# EAGLE board 1 (EAGLE 5.10)

Size 160 x 100 mm. Coordinates in mm from the lower left corner, seen from the top.
Outline: 0,0 160,0 160,100 0,100 0,0
Copper layers (1*16): Top 0.035mm / dielectric 1.5mm / Bottom 0.035mm
Design rules "default": minimum track width 10mil, minimum drill 24mil, track to track 8mil, track to pad 8mil, pad to pad 8mil, via to via 8mil, smd to smd 8mil, copper to edge 40mil, drill to drill 8mil, minimum pad ring 10mil, minimum via ring 8mil, stop-mask expansion 4mil, vias tented up to drill 0mil, thermal gap 10mil

## Footprints (pad centres in the part's own frame; a part is rotated, then mirrored left to right if it is on the bottom)
C025-050X050 = drill 0.813 octagon: 1 -1.27,0; 2 1.27,0
C1206K = smd 1.5 x 2: 1 -1.5,0; 2 1.5,0
10X02MTA = drill 1.016 long: 1 1.27,0; 2 -1.27,0
1X06 = drill 1.016 long: 1 -6.35,0; 2 -3.81,0; 3 -1.27,0; 4 1.27,0; 5 3.81,0; 6 6.35,0
1X05 = drill 1.016 long: 1 -5.08,0; 2 -2.54,0; 3 0,0; 4 2.54,0; 5 5.08,0
1X30 = drill 1.016 long: 1 -36.83,0; 2 -34.29,0; 3 -31.75,0; 4 -29.21,0; 5 -26.67,0; 6 -24.13,0; 7 -21.59,0; 8 -19.05,0; 9 -16.51,0; 10 -13.97,0; 11 -11.43,0; 12 -8.89,0; 13 -6.35,0; 14 -3.81,0; 15 -1.27,0; 16 1.27,0; 17 3.81,0; 18 6.35,0; 19 8.89,0; 20 11.43,0; 21 13.97,0; 22 16.51,0; 23 19.05,0; 24 21.59,0; 25 24.13,0; 26 26.67,0; 27 29.21,0; 28 31.75,0; 29 34.29,0; 30 36.83,0
1X02 = drill 1.016 long: 1 -1.27,0; 2 1.27,0
1X04 = drill 1.016 long: 1 -3.81,0; 2 -1.27,0; 3 1.27,0; 4 3.81,0
1X03 = drill 1.016 long: 1 -2.54,0; 2 0,0; 3 2.54,0
1X14 = drill 1.016 long: 1 -16.51,0; 2 -13.97,0; 3 -11.43,0; 4 -8.89,0; 5 -6.35,0; 6 -3.81,0; 7 -1.27,0; 8 1.27,0; 9 3.81,0; 10 6.35,0; 11 8.89,0; 12 11.43,0; 13 13.97,0; 14 16.51,0
1X12 = drill 1.016 long: 1 -13.97,0; 2 -11.43,0; 3 -8.89,0; 4 -6.35,0; 5 -3.81,0; 6 -1.27,0; 7 1.27,0; 8 3.81,0; 9 6.35,0; 10 8.89,0; 11 11.43,0; 12 13.97,0
1X01 = drill 1.016 octagon: 1 0,0
0207/10 = drill 0.813 octagon: 1 -5.08,0; 2 5.08,0
L4532M = smd 2 x 2.4: 1 -1.9,0; 2 1.9,0
HC49/S = drill 0.813 round: 1 -2.413,0; 2 2.413,0
LQFP144 = smd 0.25 x 1: 1 -8.75,-10.5; 2 -8.25,-10.5; 3 -7.75,-10.5; 4 -7.25,-10.5; 5 -6.75,-10.5; 6 -6.25,-10.5; 7 -5.75,-10.5; 8 -5.25,-10.5; 9 -4.75,-10.5; 10 -4.25,-10.5; 11 -3.75,-10.5; 12 -3.25,-10.5; 13 -2.75,-10.5; 14 -2.25,-10.5; 15 -1.75,-10.5; 16 -1.25,-10.5; 17 -0.75,-10.5; 18 -0.25,-10.5; 19 0.25,-10.5; 20 0.75,-10.5; 21 1.25,-10.5; 22 1.75,-10.5; 23 2.25,-10.5; 24 2.75,-10.5; 25 3.25,-10.5; 26 3.75,-10.5; 27 4.25,-10.5; 28 4.75,-10.5; 29 5.25,-10.5; 30 5.75,-10.5; 31 6.25,-10.5; 32 6.75,-10.5; 33 7.25,-10.5; 34 7.75,-10.5; 35 8.25,-10.5; 36 8.75,-10.5; 73 8.75,10.5; 74 8.25,10.5; 75 7.75,10.5; 76 7.25,10.5; 77 6.75,10.5; 78 6.25,10.5; 79 5.75,10.5; 80 5.25,10.5; 81 4.75,10.5; 82 4.25,10.5; 83 3.75,10.5; 84 3.25,10.5; 85 2.75,10.5; 86 2.25,10.5; 87 1.75,10.5; 88 1.25,10.5; 89 0.75,10.5; 90 0.25,10.5; 91 -0.25,10.5; 92 -0.75,10.5; 93 -1.25,10.5; 94 -1.75,10.5; 95 -2.25,10.5; 96 -2.75,10.5; 97 -3.25,10.5; 98 -3.75,10.5; 99 -4.25,10.5; 100 -4.75,10.5; 101 -5.25,10.5; 102 -5.75,10.5; 103 -6.25,10.5; 104 -6.75,10.5; 105 -7.25,10.5; 106 -7.75,10.5; 107 -8.25,10.5; 108 -8.75,10.5 | smd 1 x 0.25: 37 10.5,-8.75; 38 10.5,-8.25; 39 10.5,-7.75; 40 10.5,-7.25; 41 10.5,-6.75; 42 10.5,-6.25; 43 10.5,-5.75; 44 10.5,-5.25; 45 10.5,-4.75; 46 10.5,-4.25; 47 10.5,-3.75; 48 10.5,-3.25; 49 10.5,-2.75; 50 10.5,-2.25; 51 10.5,-1.75; 52 10.5,-1.25; 53 10.5,-0.75; 54 10.5,-0.25; 55 10.5,0.25; 56 10.5,0.75; 57 10.5,1.25; 58 10.5,1.75; 59 10.5,2.25; 60 10.5,2.75; 61 10.5,3.25; 62 10.5,3.75; 63 10.5,4.25; 64 10.5,4.75; 65 10.5,5.25; 66 10.5,5.75; 67 10.5,6.25; 68 10.5,6.75; 69 10.5,7.25; 70 10.5,7.75; 71 10.5,8.25; 72 10.5,8.75; 109 -10.5,8.75; 110 -10.5,8.25; 111 -10.5,7.75; 112 -10.5,7.25; 113 -10.5,6.75; 114 -10.5,6.25; 115 -10.5,5.75; 116 -10.5,5.25; 117 -10.5,4.75; 118 -10.5,4.25; 119 -10.5,3.75; 120 -10.5,3.25; 121 -10.5,2.75; 122 -10.5,2.25; 123 -10.5,1.75; 124 -10.5,1.25; 125 -10.5,0.75; 126 -10.5,0.25; 127 -10.5,-0.25; 128 -10.5,-0.75; 129 -10.5,-1.25; 130 -10.5,-1.75; 131 -10.5,-2.25; 132 -10.5,-2.75; 133 -10.5,-3.25; 134 -10.5,-3.75; 135 -10.5,-4.25; 136 -10.5,-4.75; 137 -10.5,-5.25; 138 -10.5,-5.75; 139 -10.5,-6.25; 140 -10.5,-6.75; 141 -10.5,-7.25; 142 -10.5,-7.75; 143 -10.5,-8.25; 144 -10.5,-8.75

## Placement (x,y rotation side)
C1  [C025-050X050]  92.21,34.88 180 top
C2  [C1206K]  102.23,48.44 270 top
C3  [C1206K]  109.44,68.26 0 top
C4  [C1206K]  109.52,73.04 0 top
C5  [C1206K]  105.13,48.17 270 top
C6  [C1206K]  101.71,53.01 0 top
C7  [C1206K]  101.66,55.68 0 top
C8  [C1206K]  56.25,31.14 180 top
C9  [C1206K]  49.8,32.62 270 top
J1  [10X02MTA]  132.21,30.29 90 top
J2  [10X02MTA]  33.58,91.55 180 top
J3  [10X02MTA]  133.61,90.19 0 top
JP1  [1X06]  37.18,69.04 90 top
JP2  [1X05]  52.92,82.18 180 top
JP3  [1X05]  30.18,55.02 90 top
JP4  [1X30]  82.64,102.45 180 top
JP5  [1X30]  12.92,48.69 270 top
JP6  [1X30]  99.26,5.07 0 top
JP7  [1X30]  99.25,-2.66 0 top
JP8  [1X30]  82.49,108.97 180 top  (outside the outline)
JP9  [1X02]  122.11,95.7 90 top
JP10  [1X02]  128.7,95.63 90 top
JP11  [1X02]  31.97,23.44 0 top
JP12  [1X02]  31.98,18.56 0 top
JP13  [1X04]  15.57,4.95 0 top
JP14  [1X04]  15.33,-2.67 0 top
JP15  [1X30]  1.52,48.59 270 top
JP16  [1X03]  131.7,46.65 270 top
JP17  [1X03]  137.72,46.73 270 top
JP18  [1X14]  41.08,-2.39 180 top
JP19  [1X14]  41.16,5.24 0 top
JP20  [1X12]  131.46,67.78 270 top
JP21  [1X12]  137.99,67.84 270 top
JP22  [1X01]  68.26,42.35 0 top
JP23  [1X01]  43.09,66.17 0 top
JP24  [1X01]  46.95,31.42 0 top
L1  [0207/10]  97.45,40.25 180 top
L2  [L4532M]  95.47,28.71 180 top
Q1  [HC49/S]  101.55,70.64 270 top
Q2  [HC49/S]  58.73,37.08 0 top
U1  [LQFP144]  80.11,54.15 0 top

## Library data of the parts
C1-C9 L1 L2 = rcl
J1-J3 = con-amp
JP1-JP24 = pinhead
Q1 Q2 = crystal
U1 = atmel-avr32-michel-rev1 - Copy

## Nets
GND: C1.2 C2.2 C3.2 C4.2 C5.2 C6.2 C7.2 C8.2 C9.2 J1.1 J2.1 J3.1 JP1.1 JP2.1 JP3.1 JP6.17 JP7.17 JP24.1 U1.6 U1.37 U1.52 U1.56 U1.76 U1.104 U1.119
N$1: C2.1 C5.1 U1.54
N$2: C4.1 Q1.1 U1.70
N$3: JP2.4 JP5.8 JP15.8 U1.114
N$4: C3.1 Q1.2 U1.69
N$5: C6.1 C7.1 U1.55
N$6: C8.1 Q2.2 U1.144
N$7: C9.1 Q2.1 U1.143
N$8: JP1.6 JP5.5 JP15.5 U1.111
N$9: JP1.5 JP5.6 JP15.6 U1.112
N$10: JP1.4 JP5.7 JP15.7 U1.113
N$11: JP1.3 JP22.1 JP23.1 U1.142
N$13: JP5.9 JP15.9 U1.115
N$14: JP4.1 JP8.1 U1.73
N$15: JP4.2 JP8.2 U1.74
N$16: JP3.4 JP5.12 JP15.12 U1.120
N$17: JP3.3 JP5.13 JP15.13 U1.121
N$18: JP3.2 JP5.14 JP15.14 U1.122
N$19: JP4.3 JP8.3 U1.77
N$20: JP4.4 JP8.4 U1.78
N$21: JP4.5 JP8.5 U1.79
N$22: JP4.6 JP8.6 U1.80
N$23: JP4.7 JP8.7 U1.81
N$24: JP4.8 JP8.8 U1.82
N$25: JP4.9 JP8.9 U1.83
N$26: JP4.10 JP8.10 U1.84
N$27: JP4.11 JP8.11 U1.85
N$28: JP4.12 JP8.12 U1.86
N$29: JP4.13 JP8.13 U1.87
N$30: JP4.14 JP8.14 U1.88
N$31: JP4.15 JP8.15 U1.89
N$32: JP11.1 JP12.1 U1.140
N$33: JP4.16 JP8.16 U1.90
N$34: JP4.17 JP8.17 U1.91
N$35: JP4.18 JP8.18 U1.92
N$36: JP4.19 JP8.19 U1.93
N$37: JP4.20 JP8.20 U1.94
N$38: JP4.21 JP8.21 U1.95
N$39: JP4.22 JP8.22 U1.96
N$40: JP4.23 JP8.23 U1.97
N$41: JP4.24 JP8.24 U1.98
N$42: JP4.25 JP8.25 U1.99
N$43: JP4.26 JP8.26 U1.100
N$44: JP4.27 JP8.27 U1.101
N$45: JP4.28 JP8.28 U1.102
N$46: JP4.29 JP8.29 U1.105
N$47: JP2.2 JP4.30 JP8.30 U1.106
N$48: JP5.1 JP15.1 U1.107
N$49: JP5.2 JP15.2 U1.108
N$50: JP5.3 JP15.3 U1.109
N$51: JP5.4 JP15.4 U1.110
N$52: JP5.10 JP15.10 U1.116
N$53: JP5.11 JP15.11 U1.117
N$54: JP5.15 JP15.15 U1.123
N$55: JP5.16 JP15.16 U1.124
N$56: JP5.17 JP15.17 U1.125
N$57: JP5.18 JP15.18 U1.126
N$58: JP5.19 JP15.19 U1.127
N$59: JP5.20 JP15.20 U1.128
N$60: JP5.21 JP15.21 U1.129
N$61: JP5.22 JP15.22 U1.130
N$62: JP5.23 JP15.23 U1.131
N$63: JP5.24 JP15.24 U1.132
N$64: JP5.25 JP15.25 U1.133
N$65: JP5.26 JP15.26 U1.134
N$66: JP5.27 JP15.27 U1.135
N$67: JP5.28 JP15.28 U1.136
N$68: JP5.29 JP15.29 U1.137
N$69: JP5.30 JP15.30 U1.138
N$70: JP9.1 JP10.1 U1.71
N$71: JP6.1 JP7.1 U1.21
N$72: JP6.2 JP7.2 U1.22
N$73: JP6.3 JP7.3 U1.23
N$74: JP6.4 JP7.4 U1.24
N$75: JP6.5 JP7.5 U1.25
N$76: JP6.6 JP7.6 U1.26
N$77: JP6.9 JP7.9 U1.29
N$78: JP6.8 JP7.8 U1.28
N$79: JP6.7 JP7.7 U1.27
N$80: JP6.10 JP7.10 U1.30
N$81: JP6.11 JP7.11 U1.31
N$82: JP6.12 JP7.12 U1.32
N$83: JP6.13 JP7.13 U1.33
N$84: JP6.14 JP7.14 U1.34
N$85: JP6.15 JP7.15 U1.35
N$86: JP6.16 JP7.16 U1.36
N$87: JP6.19 JP7.19 U1.39
N$88: JP6.20 JP7.20 U1.40
N$89: JP6.21 JP7.21 U1.41
N$90: JP6.22 JP7.22 U1.42
N$91: JP6.23 JP7.23 U1.43
N$92: JP6.24 JP7.24 U1.44
N$93: JP6.25 JP7.25 U1.45
N$94: JP6.26 JP7.26 U1.46
N$95: JP6.27 JP7.27 U1.47
N$96: JP6.28 JP7.28 U1.48
N$97: JP16.2 JP17.2 U1.50
N$98: JP16.1 JP17.1 U1.51
N$99: JP16.3 JP17.3 U1.49
N$100: JP9.2 JP10.2 U1.72
N$101: JP11.2 JP12.2 U1.141
N$102: JP13.1 JP14.1 U1.1
N$103: JP13.2 JP14.2 U1.2
N$104: JP13.3 JP14.3 U1.3
N$105: JP13.4 JP14.4 U1.4
N$106: JP18.1 JP19.14 U1.20
N$107: JP18.2 JP19.13 U1.19
N$108: JP18.3 JP19.12 U1.18
N$109: JP18.4 JP19.11 U1.17
N$110: JP18.5 JP19.10 U1.16
N$111: JP18.6 JP19.9 U1.15
N$112: JP18.7 JP19.8 U1.14
N$113: JP18.8 JP19.7 U1.13
N$114: JP18.9 JP19.6 U1.12
N$115: JP18.10 JP19.5 U1.11
N$116: JP18.11 JP19.4 U1.10
N$117: JP18.12 JP19.3 U1.9
N$118: JP18.13 JP19.2 U1.8
N$119: JP18.14 JP19.1 U1.7
N$120: JP20.1 JP21.1 U1.68
N$121: JP20.2 JP21.2 U1.67
N$122: JP20.3 JP21.3 U1.66
N$123: JP20.4 JP21.4 U1.65
N$124: JP20.5 JP21.5 U1.64
N$125: JP20.6 JP21.6 U1.63
N$126: JP20.7 JP21.7 U1.62
N$127: JP20.8 JP21.8 U1.61
N$128: JP20.9 JP21.9 U1.60
N$129: JP20.10 JP21.10 U1.59
N$130: JP20.11 JP21.11 U1.58
N$131: JP20.12 JP21.12 U1.57
N$133: C1.1 JP6.18 JP7.18 L1.2 L2.2 U1.38
VCC: J1.2 J2.2 J3.2 JP1.2 JP2.5 JP3.5 L1.1 L2.1 U1.5 U1.53 U1.75 U1.103 U1.118

## Tracks (layer width: path | path; a pad name or v marks a point on that pad's centre or on a via)
GND  (24 unrouted)
N$1  (2 unrouted)
N$2  (2 unrouted)
N$3  (3 unrouted)
N$4  (2 unrouted)
N$5  (2 unrouted)
N$6  (2 unrouted)
N$7  (2 unrouted)
N$8  (3 unrouted)
N$9  (3 unrouted)
N$10  (3 unrouted)
N$11  (3 unrouted)
N$13  (2 unrouted)
N$14  (2 unrouted)
N$15  (2 unrouted)
N$16  (3 unrouted)
N$17  (3 unrouted)
N$18  (3 unrouted)
N$19  (2 unrouted)
N$20  (2 unrouted)
N$21  (2 unrouted)
N$22  (2 unrouted)
N$23  (2 unrouted)
N$24  (2 unrouted)
N$25  (2 unrouted)
N$26  (2 unrouted)
N$27  (2 unrouted)
N$28  (2 unrouted)
N$29  (2 unrouted)
N$30  (2 unrouted)
N$31  (2 unrouted)
N$32  (2 unrouted)
N$33  (2 unrouted)
N$34  (2 unrouted)
N$35  (2 unrouted)
N$36  (2 unrouted)
N$37  (2 unrouted)
N$38  (2 unrouted)
N$39  (2 unrouted)
N$40  (2 unrouted)
N$41  (2 unrouted)
N$42  (2 unrouted)
N$43  (2 unrouted)
N$44  (2 unrouted)
N$45  (2 unrouted)
N$46  (2 unrouted)
N$47  (3 unrouted)
N$48  (2 unrouted)
N$49  (2 unrouted)
N$50  (2 unrouted)
N$51  (2 unrouted)
N$52  (2 unrouted)
N$53  (2 unrouted)
N$54  (2 unrouted)
N$55  (2 unrouted)
N$56  (2 unrouted)
N$57  (2 unrouted)
N$58  (2 unrouted)
N$59  (2 unrouted)
N$60  (2 unrouted)
N$61  (2 unrouted)
N$62  (2 unrouted)
N$63  (2 unrouted)
N$64  (2 unrouted)
N$65  (2 unrouted)
N$66  (2 unrouted)
N$67  (2 unrouted)
N$68  (2 unrouted)
N$69  (2 unrouted)
N$70  (2 unrouted)
N$71  (2 unrouted)
N$72  (2 unrouted)
N$73  (2 unrouted)
N$74  (2 unrouted)
N$75  (2 unrouted)
N$76  (2 unrouted)
N$77  (2 unrouted)
N$78  (2 unrouted)
N$79  (2 unrouted)
N$80  (2 unrouted)
N$81  (2 unrouted)
N$82  (2 unrouted)
N$83  (2 unrouted)
N$84  (2 unrouted)
N$85  (2 unrouted)
N$86  (2 unrouted)
N$87  (2 unrouted)
N$88  (2 unrouted)
N$89  (2 unrouted)
N$90  (2 unrouted)
N$91  (2 unrouted)
N$92  (2 unrouted)
N$93  (2 unrouted)
N$94  (2 unrouted)
N$95  (2 unrouted)
N$96  (2 unrouted)
N$97  (2 unrouted)
N$98  (2 unrouted)
N$99  (2 unrouted)
N$100  (2 unrouted)
N$101  (2 unrouted)
N$102  (2 unrouted)
N$103  (2 unrouted)
N$104  (2 unrouted)
N$105  (2 unrouted)
N$106  (2 unrouted)
N$107  (2 unrouted)
N$108  (2 unrouted)
N$109  (2 unrouted)
N$110  (2 unrouted)
N$111  (2 unrouted)
N$112  (2 unrouted)
N$113  (2 unrouted)
N$114  (2 unrouted)
N$115  (2 unrouted)
N$116  (2 unrouted)
N$117  (2 unrouted)
N$118  (2 unrouted)
N$119  (2 unrouted)
N$120  (2 unrouted)
N$121  (2 unrouted)
N$122  (2 unrouted)
N$123  (2 unrouted)
N$124  (2 unrouted)
N$125  (2 unrouted)
N$126  (2 unrouted)
N$127  (2 unrouted)
N$128  (2 unrouted)
N$129  (2 unrouted)
N$130  (2 unrouted)
N$131  (2 unrouted)
N$133  (5 unrouted)
VCC  (12 unrouted)